# Altium PCB NIR.PcbDoc
Units mm, origin at the board's own origin, x right, y up, seen from the top; angles counter-clockwise.
Board outline 100.03 x 100.02 mm, 2 copper layers (Top Layer, Bottom Layer); 107 components, 88 nets, 257 pads, 78 vias.
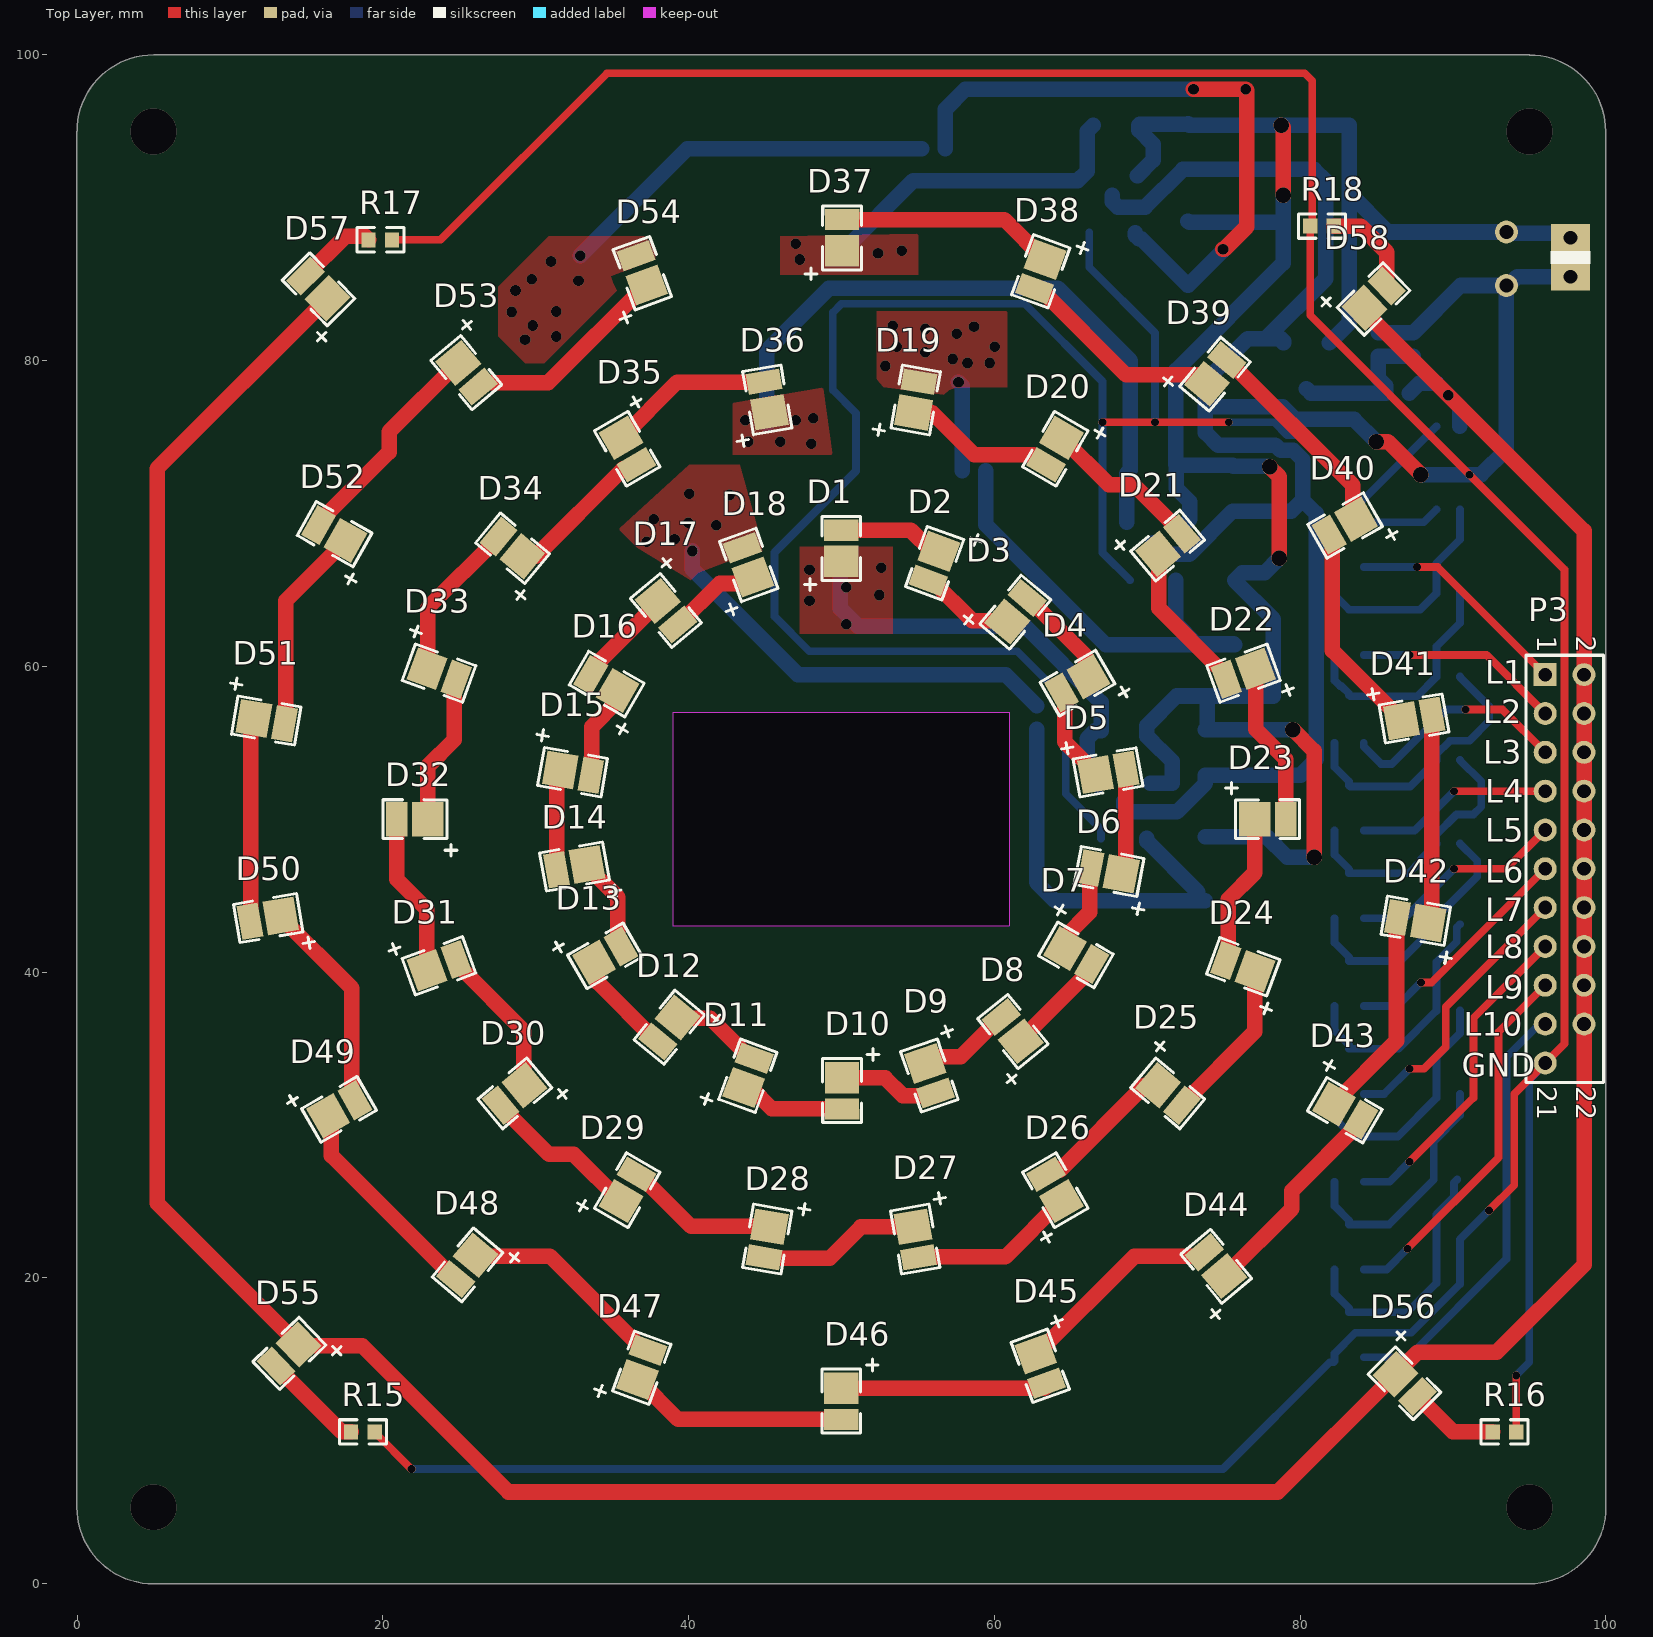
[diagram p0: Top Layer view]
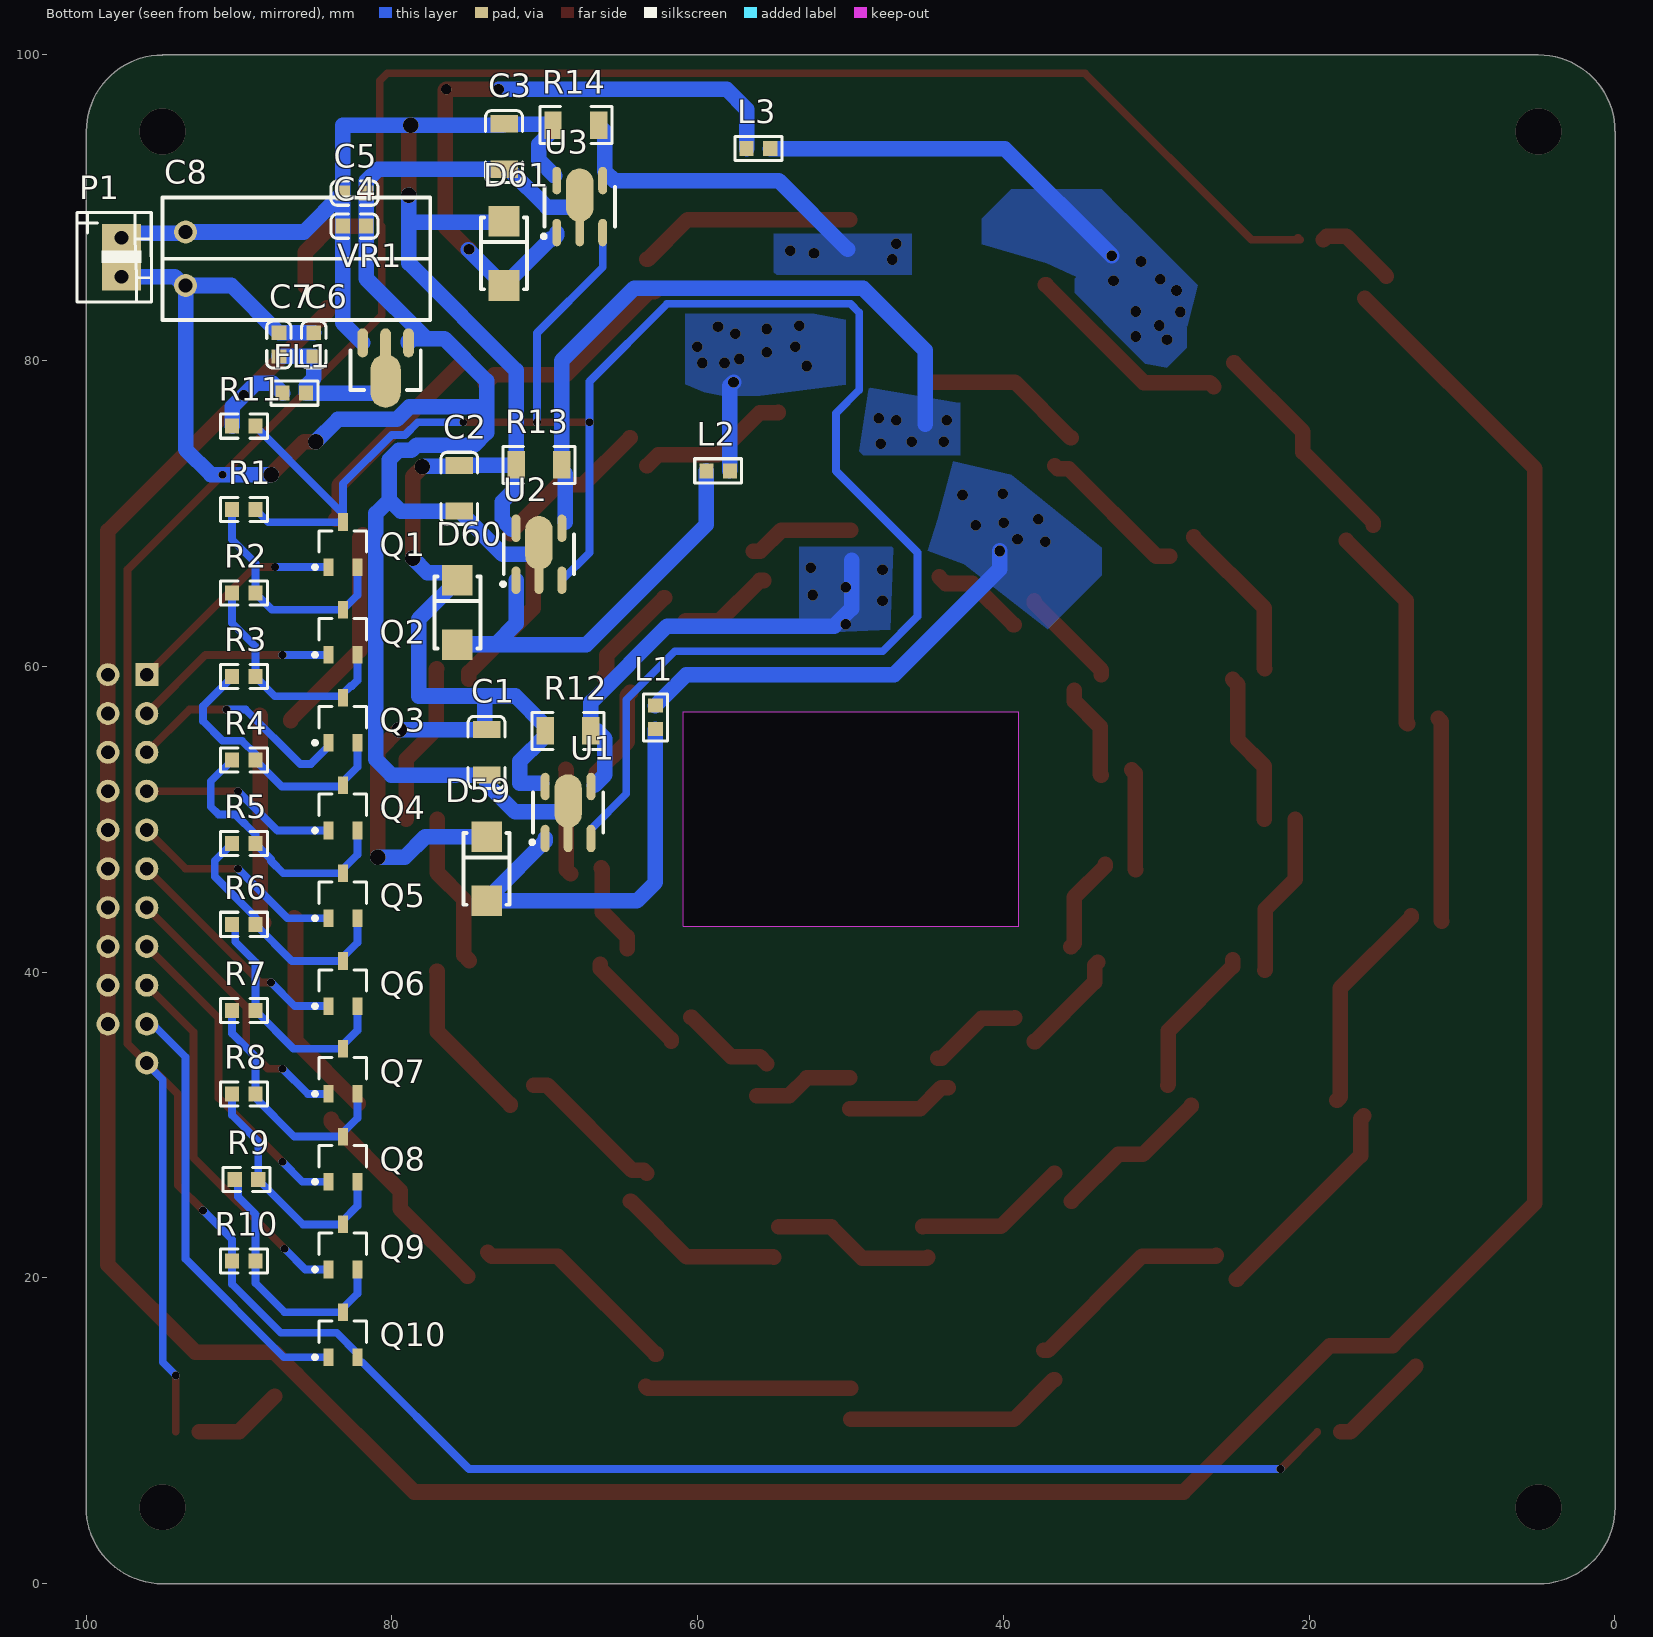
[diagram p1: Bottom Layer view, seen from below]
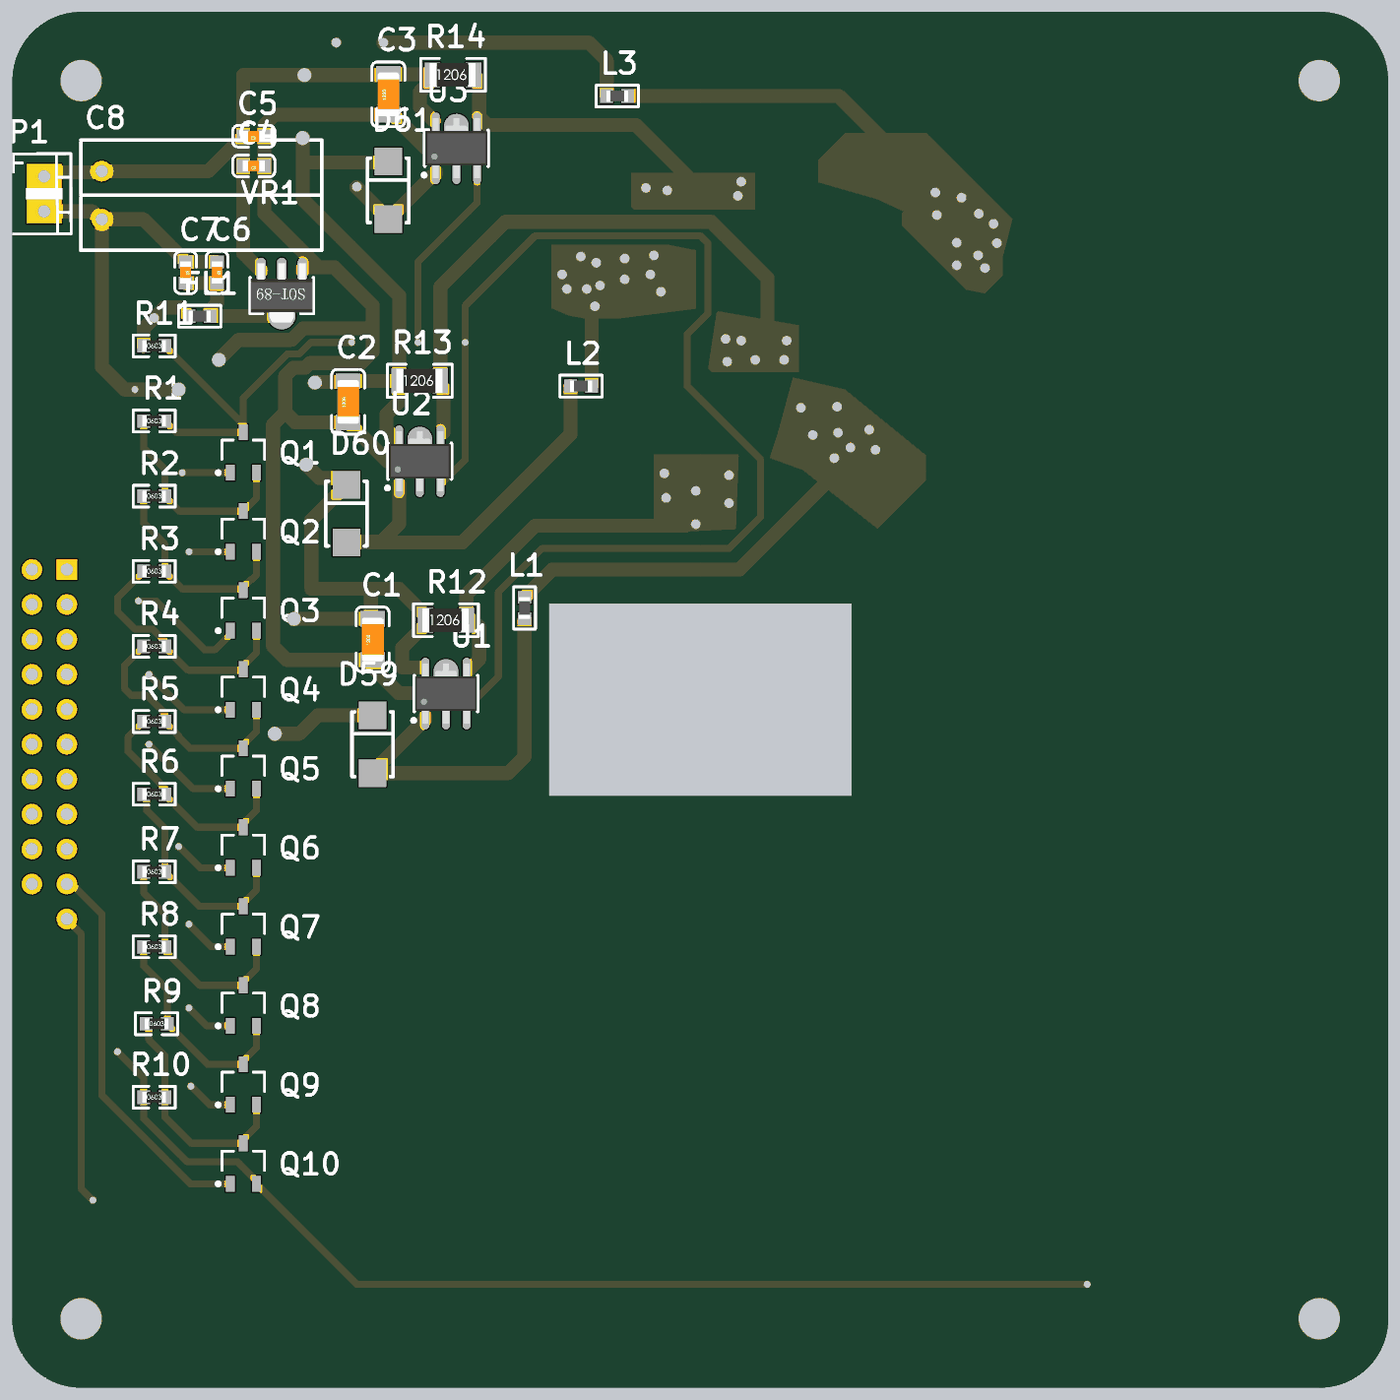
[diagram p2: 3D render of the assembled board from below, using the file's embedded part models]

## Layer stack, top to bottom
Top Solder: solder mask 0.0102, Solder Resist, Dk 3.5
Top Layer: signal copper 0.0356
Dielectric 1: dielectric 0.32, FR-4, Dk 4.8
Bottom Layer: signal copper 0.0356
Bottom Solder: solder mask 0.0102, Solder Resist, Dk 3.5

## Board outline
-0.017,5 -0.017,94.989 -0.007,95 cw(c5,95) 5,100.007 94.988,100.007 95,99.995 cw(c95,95) 99.995,95 99.995,5.014 100.009,5 cw(c95,5) 95,-0.009 5.009,-0.009 5,-0.017 cw(c5,5)
cut-out: 38.987,56.987 60.987,56.987 60.987,43.025 60.949,42.987 38.987,42.987

## Design rules (kind name [scope] priority, off if disabled: settings)
Clearance [All] p1: gap=0.254 ignorepadtopadclearanceinfootprint=FALSE except(0: Arc-Hole Track-Hole SMDPad-Hole THPad-Hole Via-Hole Fill-Hole Poly-Hole Region-Hole Text-Hole)
PlaneConnect [All] p1: planeconnectstyle=Direct reliefexpansion=0.508 reliefentries=4 reliefconductorwidth=0.254 reliefairgap=0.254
PolygonConnect [All] p1: connectstyle=Direct reliefconductorwidth=0.254 reliefentries=4 polygonreliefangle="90 Angle" airgapwidth=0.254
RoutingVias [All] p1: holewidth=0.711 width=1.27 viastyle="Through Hole" minholewidth=0.711 minwidth=1.27 maxholewidth=0.711 maxwidth=1.27
SolderMaskExpansion [All] p1: expansion=0.102
Width [All] p1: maxlimit=1.016 minlimit=0.254 preferedwidth=0.559 minimp=50.000000 maximp=50.000000 favimp=50.000000
29 further rules are at their usual default settings.

## Components (designator, comment, footprint, x,y, rotation, side; value= is the part's Value field where it differs from the comment)
C1 "100uF (475) 10% 50V" 1206_C 73.812,54.381 r90 bottom
C2 "100uF (475) 10% 50V" 1206_C 75.59,71.653 r90 bottom
C3 "100uF (475) 10% 50V" 1206_C 72.669,94.005 r90 bottom
C4 "10uF (106) 10% 25V" 0603_C 82.448,88.798 r0 bottom
C5 "100nF (104) 10% 16V" 0603_C 82.448,90.957 r0 bottom
C6 "10uF (106) 10% 25V" 0603_C 85.115,81.051 r270 bottom
C7 "100nF (104) 10% 16V" 0603_C 87.401,81.051 r270 bottom
C8 "47uF (106) 20% 50V" "470UF 35V" 93.51,86.678 r90 bottom
D1 "红灯 0603" 2385 49.987,67.767 r90 top
D2 "红灯 0603" 2385 56.069,66.695 r250 top
D3 "红灯 0603" 2385 61.416,63.608 r50 top
D4 "红灯 0603" 2385 65.385,58.877 r210 top
D5 "红灯 0603" 2385 67.497,53.075 r10 top
D6 "红灯 0603" 2385 67.441,46.595 r169 top
D7 "红灯 0603" 2385 65.39,41.095 r330 top
D8 "红灯 0603" 2385 61.177,36.17 r129 top
D9 "红灯 0603" 2385 55.776,33.176 r289 top
D10 "红灯 0603" 2385 50.04,32.194 r270.17 top
D11 "红灯 0603" 2385 43.906,33.28 r70 top
D12 "红灯 0603" 2385 38.705,36.344 r230.41 top
D13 "红灯 0603" 2385 34.589,41.097 r30 top
D14 "红灯 0603" 2385 32.478,46.9 r190 top
D15 "红灯 0603" 2385 32.478,53.075 r350 top
D16 "红灯 0603" 2385 34.589,58.877 r150 top
D17 "红灯 0603" 2385 38.559,63.608 r310 top
D18 "红灯 0603" 2385 43.906,66.695 r110 top
D19 "红灯 0603" 2385 54.877,77.496 r79.92 top
D20 "红灯 0603" 2385 63.957,74.184 r240 top
D21 "红灯 0603" 2385 71.391,67.947 r40 top
D22 "红灯 0603" 2385 76.242,59.543 r200 top
D23 "红灯 0603" 2385 77.927,50.006 r0.04 top
D24 "红灯 0603" 2385 76.219,40.368 r159.86 top
D25 "红灯 0603" 2385 71.391,32.028 r320 top
D26 "红灯 0603" 2385 63.957,25.791 r120 top
D27 "红灯 0603" 2385 54.839,22.472 r280 top
D28 "红灯 0603" 2385 45.136,22.472 r260 top
D29 "红灯 0603" 2385 36.017,25.791 r60 top
D30 "红灯 0603" 2385 28.584,32.028 r220 top
D31 "红灯 0603" 2385 23.732,40.431 r20 top
D32 "红灯 0603" 2385 22.047,50.007 r179.96 top
D33 "红灯 0603" 2385 23.732,59.543 r340 top
D34 "红灯 0603" 2385 28.436,67.769 r140.47 top
D35 "红灯 0603" 2385 36.017,74.184 r300 top
D36 "红灯 0603" 2385 45.136,77.503 r100 top
D37 "红灯 0603" 2385 50.044,88.087 r89.92 top
D38 "红灯 0603" 2385 63.018,85.79 r250 top
D39 "红灯 0603" 2385 74.478,79.174 r50 top
D40 "红灯 0603" 2385 82.895,69.188 r209.74 top
D41 "红灯 0603" 2385 87.509,56.603 r10 top
D42 "红灯 0603" 2385 87.509,43.371 r170 top
D43 "红灯 0603" 2385 82.983,30.937 r330 top
D44 "红灯 0603" 2385 74.478,20.801 r130 top
D45 "红灯 0603" 2385 63.018,14.185 r290 top
D46 "红灯 0603" 2385 49.987,11.887 r270 top
D47 "红灯 0603" 2385 36.956,14.185 r70 top
D48 "红灯 0603" 2385 25.497,20.801 r230 top
D49 "红灯 0603" 2385 17.189,31.051 r30 top
D50 "红灯 0603" 2385 12.439,43.526 r189.76 top
D51 "红灯 0603" 2385 12.439,56.449 r350.24 top
D52 "红灯 0603" 2385 16.789,68.682 r150.62 top
D53 "红灯 0603" 2385 25.497,79.174 r310 top
D54 "红灯 0603" 2385 36.956,85.79 r110 top
D55 "红灯 0603" 2385 13.84,15.021 r224.05 top
D56 "红灯 0603" 2385 86.869,13.062 r314.97 top
D57 "红灯 0603" 2385 15.749,84.716 r134.59 top
D58 "红灯 0603" 2385 84.856,84.083 r44.36 top
D59 "SS14" SMA(DO-214AC)_S1 73.812,46.761 r270 bottom
D60 "SS14" SMA(DO-214AC)_S1 75.717,63.525 r270 bottom
D61 "SS14" SMA(DO-214AC)_S1 72.669,87.02 r270 bottom
FL1 "BLM18HE152SN1" 0603_L 86.385,77.876 r0 bottom
L1 "680nH ±5% 0603" 0603_L 62.763,56.667 r270 bottom
L2 "680nH ±5% 0603" 0603_L 58.658,72.796 r0 bottom
L3 "680nH ±5% 0603" 0603_L 56.029,93.878 r0 bottom
P1 "Header 2" DIP-2.54-2P 97.688,88.036 r270 bottom
P3 "Header 11X2" HDR2X11 96.037,59.461 r270 top
Q1 "AO3400A N道沟 X0YV1T SOT-23" SOT-23-3L 83.21,67.97 r270 bottom
Q2 "AO3400A N道沟 X0YV1T SOT-23" SOT-23-3L 83.21,62.227 r270 bottom
Q3 "AO3400A N道沟 X0YV1T SOT-23" SOT-23-3L 83.21,56.484 r270 bottom
Q4 "AO3400A N道沟 X0YV1T SOT-23" SOT-23-3L 83.21,50.741 r270 bottom
Q5 "AO3400A N道沟 X0YV1T SOT-23" SOT-23-3L 83.21,44.998 r270 bottom
Q6 "AO3400A N道沟 X0YV1T SOT-23" SOT-23-3L 83.21,39.254 r270 bottom
Q7 "AO3400A N道沟 X0YV1T SOT-23" SOT-23-3L 83.21,33.511 r270 bottom
Q8 "AO3400A N道沟 X0YV1T SOT-23" SOT-23-3L 83.21,27.768 r270 bottom
Q9 "AO3400A N道沟 X0YV1T SOT-23" SOT-23-3L 83.21,22.025 r270 bottom
Q10 "AO3400A N道沟 X0YV1T SOT-23" SOT-23-3L 83.21,16.281 r270 bottom
R1 "13.7KΩ (1003) ±1%" 0603_R 89.687,70.256 r180 bottom
R2 "10(23.7)KΩ (1003) ±1%" 0603_R 89.687,64.795 r180 bottom
R3 "12(35.7)KΩ (1003) ±1%" 0603_R 89.687,59.334 r180 bottom
R4 "14.2(49.9)KΩ (1003) ±1%" 0603_R 89.687,53.873 r180 bottom
R5 "16.6(66.5)KΩ (1003) ±1%" 0603_R 89.687,48.412 r180 bottom
R6 "22.2(88.7)KΩ (1003) ±1%" 0603_R 89.687,43.127 r180 bottom
R7 "29.3(118)KΩ (1003) ±1%" 0603_R 89.687,37.49 r180 bottom
R8 "38(156)KΩ (1003) ±1%" 0603_R 89.687,32.029 r180 bottom
R9 "54(210)KΩ (1003) ±1%" 0603_R 89.511,26.441 r180 bottom
R10 "90(300)KΩ (1003) ±1%" 0603_R 89.687,21.107 r180 bottom
R11 "100KΩ (1003) ±1%" 0603_R 89.687,75.717 r180 bottom
R12 "0.56Ω (R100) ±1%" 1206_R 68.478,55.778 r180 bottom
R13 "0.56Ω (R100) ±1%" 1206_R 70.383,73.177 r180 bottom
R14 "0.56Ω (R100) ±1%" 1206_R 67.97,95.414 r180 bottom
R15 "330Ω (3300) ±1%" 0603_R 18.694,9.931 r0 top
R16 "330Ω (3300) ±1%" 0603_R 93.37,9.931 r0 top
R17 "330Ω (3300) ±1%" 0603_R 19.837,87.909 r0 top
R18 "330Ω (3300) ±1%" 0603_R 81.432,88.798 r180 top
U1 "OC5265" SOT-89-5 68.478,50.444 r270 bottom
U2 "OC5265" SOT-89-5 70.383,67.335 r270 bottom
U3 "OC5265" SOT-89-5 67.716,90.08 r270 bottom
VR1 "SE8533" SOT-89(SOT-89-3) 80.416,81.17 r90 bottom

## Footprints (in the part's own frame and the unit in brackets; to place one, negate y for a bottom-side part, rotate by r counter-clockwise, add the part's x,y. Pads: shape width x height; smd on the part's side, far side on the other; paste and mask are expansions set on the pad)
"470UF 35V" [mm]
  round 1.5 hole 0.9: 1(-1.76,-0.012) 2(1.74,-0.012)
  silkscreen extent -4.01,-16.01 3.99,1.51
0603_C [mm]
  rect 0.93x0.98 smd: 1(-0.77,0) 2(0.77,0)
  silkscreen extent -1.53,-0.79 1.54,0.79, body extent -0.8,-0.4 0.8,0.4, height 0.3
0603_L [mm]
  rect 0.93x0.98 smd: 1(-0.77,0) 2(0.77,0)
  silkscreen extent -1.53,-0.79 1.54,0.79, body extent -0.8,-0.41 0.8,0.41, height 0.46
0603_R [mm]
  rect 0.93x0.98 smd: 1(-0.77,0) 2(0.77,0)
  silkscreen extent -1.53,-0.79 1.54,0.79, body extent -0.85,-0.4 0.85,0.4, height 0.56
1206_C [mm]
  rect 1.13x1.8 smd: 1(-1.49,0) 2(1.49,0)
  silkscreen extent -2.36,-1.2 2.35,1.2, body extent -1.6,-0.81 1.6,0.79, height 1
1206_R [mm]
  rect 1.13x1.8 smd: 1(-1.49,0) 2(1.49,0)
  silkscreen extent -2.36,-1.2 2.35,1.2, body extent -1.7,-0.86 1.65,0.87, height 0.85
2385 [mm]
  rect 2.06x2.24 smd: A(-0.889,0)
  rect 1.39x2.24 smd: K(1.143,0)
  silkscreen extent -2.79,-1.27 2.03,2.41
DIP-2.54-2P [mm]
  rect 1.8x2.54 hole 0.9: 1(0,0) 2(2.54,0)
  silkscreen extent -1.65,-2.92 4.2,1.96
HDR2X11 [mm] "Connector; Header; 11x2 Position"
  rect 1.5x1.5 hole 0.9: 1(0,0)
  round 1.5 hole 0.9: 2(0,2.54) 3(2.54,0) 4(2.54,2.54) 5(5.08,0) 6(5.08,2.54) 7(7.62,0) 8(7.62,2.54) 9(10.16,0) 10(10.16,2.54) 11(12.7,0) 12(12.7,2.54) 13(15.24,0) 14(15.24,2.54) 15(17.78,0) 16(17.78,2.54) 17(20.32,0) 18(20.32,2.54) 19(22.86,0) 20(22.86,2.54) 21(25.4,0)
  silkscreen extent -1.27,-1.27 26.67,3.81
SMA(DO-214AC)_S1 [mm]
  rect 2x2 smd: 1(2.1,0) 2(-2.1,0)
  silkscreen extent -2.35,-1.5 2.35,1.5
SOT-23-3L [mm] "http://www.aosmd.com/res/packaging_information/SOT-23-3L.pdf"
  rect 1.15x0.65 smd: 1(1.475,-0.95) 2(1.475,0.95) 3(-1.475,0)
  silkscreen extent -0.9,-1.95 1.6,1.55, body extent -0.9,-1.55 0.9,1.55, height 1.25
SOT-89(SOT-89-3) [mm]
  oval 1.9x0.7 smd: 1(0,-1.5) 3(0,1.5)
  oval 3.5x2 smd: 2(-2.5,0)
  oval 2.1x0.7 smd: 2(-0.1,0)
  silkscreen extent -3.1,-2.3 -0.5,2.3, body extent -3.75,-2.25 0.55,2.25, height 1.51
SOT-89-5 [mm]
  oval 1.8x0.58 smd: 1(1.7,-1.5) 3(1.7,1.5) 4(-1.7,1.5) 5(-1.7,-1.5)
  oval 3.5x1.8 smd: 2(-0.75,0)
  oval 2.4x0.58 smd: 2(1.4,0)
  silkscreen extent -1.3,-2.48 2.07,2.3, body extent -2.17,-2.25 2.18,2.25, height 1.5

## Part data
C1 C2 C3: library part "1206 4.7uF (475) 10% 50V", "贴片电容", Package=1206, SuppliersPartNumber=C29823, ComponentLink1Description=供应商, ComponentLink1URL=http://www.szlcsc.com/product/details_30577.html, Supplier=LC
C4 C6: library part "0805 10uF (106) 10% 25V", "贴片电容", Package=0805, SuppliersPartNumber=C15850, ComponentLink1Description=供应商, ComponentLink1URL=http://www.szlcsc.com/product/details_16532.html, Supplier=LC
C5 C7: library part "0402 100nF (104) 10% 16V", "贴片电容", Package=0402, SuppliersPartNumber=C1525, ComponentLink1Description=供应商, ComponentLink1URL=http://www.szlcsc.com/product/details_1877.html, Supplier=LC
C8: library part "0402 10uF (106) 20% 6.3V", "贴片电容", Package=0402, SuppliersPartNumber=C15525, ComponentLink1Description=供应商链接, ComponentLink1URL=http://www.szlcsc.com/product/details_16204.html, Supplier=LC
D1 D2 D3 D4 D5 D6 D7 D8 D9 D10 D11 D12 D13 D14 D15 D16 D17 D18 D19 D20 D21 D22 D23 D24 D25 D26 D27 D28 D29 D30 D31 D32 D33 D34 D35 D36 D37 D38 D39 D40 D41 D42 D43 D44 D45 D46 D47 D48 D49 D50 D51 D52 D53 D54 D55 D56 D57 D58: library part "0603 红灯", "发光二极管", Package=0603, SuppliersPartNumber=C2286, ComponentLink1Description=供应商, ComponentLink1URL=http://www.szlcsc.com/product/details_2659.html, Supplier=LC
D59 D60 D61: library part "SMA(DO-214AC) SS54", "二极管", Package=SMA(DO-214AC), SuppliersPartNumber=C22452, ComponentLink1Description=供应商, ComponentLink1URL=http://www.szlcsc.com/product/details_23178.html, Supplier=LC
FL1: library part IND_DM_1MH_2.5A, "差模电感1mH/2.5A", Text Field1=29.5mm, Text Field2=43120014, Text Field3=HI
L1 L2 L3: library part "0603 68nH 5% 0603", "贴片电感", Package=0603, SuppliersPartNumber=C13415, ComponentLink1Description=供应商, ComponentLink1URL=http://www.szlcsc.com/product/details_14064.html, Supplier=LC
P1: "Header, 2-Pin", LatestRevisionDate=17-Jul-2002, LatestRevisionNote="Re-released for DXP Platform.", Publisher="Altium Limited"
P3: "Header, 11-Pin, Dual row", LatestRevisionDate=17-Jul-2002, LatestRevisionNote="Re-released for DXP Platform.", Publisher="Altium Limited"
Q1 Q2 Q3 Q4 Q5 Q6 Q7 Q8 Q9 Q10: "MOS(场效应管)", Package=SOT-23, SuppliersPartNumber=C20917, ComponentLink1Description=供应商, ComponentLink1URL=http://www.szlcsc.com/product/details_21629.html, Supplier=LC
R1 R2 R3 R4 R5 R6 R7 R8 R9 R10 R11: library part "0603 100KΩ (1003) 1%", "贴片电阻", Package=0603, SuppliersPartNumber=C25803, ComponentLink1Description=供应商, ComponentLink1URL=http://www.szlcsc.com/product/details_26546.html, Supplier=LC
R12 R13 R14: library part "1206 0.1Ω (R100) 1%", "贴片电阻", Package=1206, SuppliersPartNumber=C25334, ComponentLink1Description=供应商, ComponentLink1URL=http://www.szlcsc.com/product/details_26077.html, Supplier=LC
R15 R16 R17 R18: library part "0603 330Ω (3300) 1%", "贴片电阻", Package=0603, SuppliersPartNumber=C23138, ComponentLink1Description=供应商, ComponentLink1URL=http://www.szlcsc.com/product/details_23865.html, Supplier=LC
VR1: library part "SOT-223 AMS1117-3.3", "低压差线性稳压(LDO)", Package=SOT-223, SuppliersPartNumber=C6186, ComponentLink1Description=供应商, ComponentLink1URL=http://www.szlcsc.com/product/details_6652.html, Supplier=LC

## Via types
v1: diameter 0.7, hole 0.7, Top Layer to Bottom Layer, tented both sides, 50 vias
v2: diameter 0.508, hole 0.508, Top Layer to Bottom Layer, tented both sides, 13 vias
v3: diameter 1.016, hole 1.016, Top Layer to Bottom Layer, tented both sides, 8 vias
v4: diameter 3, hole 3, Top Layer to Bottom Layer, 4 vias
v5: diameter 0.5, hole 0.5, Top Layer to Bottom Layer, tented both sides, 3 vias

## Nets (pads, with @x,y where several pads share a name; then routed paths per layer and width w, separated by ;. In a path a pad name is that pad's centre, name@x,y a point inside that pad or via, vN(x,y) a via of type N, cw(c..) or ccw(c..) an arc to the next point about the centre after c; other vN are vias at no path point)
3.3V: D55.A D56.A D57.A D58.A FL1.2 P3.2 P3.4 P3.6 P3.8 P3.10 P3.12 P3.14 P3.16 P3.18 P3.20 R11.1 | length 245.2
  Top Layer w1.016: D57.A 5.232,72.943 5.232,24.888 14.479,15.641 D55.A 14.542,15.576 18.638,15.576 28.219,5.994 78.544,5.994 D56.A 87.688,15.138 92.862,15.138 98.577,20.853 98.577,34.061 P3.20 P3.18 P3.16 P3.14 P3.12 P3.10 P3.8 P3.6 P3.4 P3.2 98.577,68.859 84.221,83.216 D58.A
  Bottom Layer w1.016: FL1.2 87.79,78.511 88.925,78.511 90.457,76.979 R11.1
  other v1: 89.691,77.745
36V: C1.2 C2.2 C3.2 C4.2 C5.2 C8.2 D59.2 D60.2 D61.2 P1.1 R12.1 R13.1 R14.1 U1.5 U2.5 U3.5 VR1.3 | length 148.6
  Top Layer w1.016: v3(78.003,73.05) 78.638,72.415 v3(78.638,67.081) ; v3(78.765,95.402) 78.892,95.275 v3(78.892,90.83) ; v3(79.527,55.871) 80.924,54.474 v3(80.924,47.523)
  Bottom Layer w1.016: U3.5@69.367,92.1 70.383,93.116 70.383,94.156 69.46,95.079 R14.1 69.501,95.455 72.629,95.455 C3.2 72.762,95.402 v3(78.765,95.402) 83.218,95.402 C5.2 ; U1.5@70.196,52.349 71.653,52.349 71.653,53.786 70.935,54.505 70.907,54.505 69.968,55.443 R12.1 69.968,56.113 71.919,58.064 73.939,58.064 ; U2.5@72.161,68.986 72.799,69.624 72.799,70.762 71.89,71.67 R13.1@71.89,73.16 ; D61.2 72.737,89.052 78.892,89.052 ; D59.2 77.817,48.861 79.155,47.523 v3(80.924,47.523) ; C1.2 C1.2@73.882,55.871 ; v3@77.84,73.086 75.647,73.086 C2.2 75.573,73.16 R13.1@71.89,73.16 ; v3(78.638,67.081) 77.674,66.117 76.209,66.117 D60.2 78.257,63.085 78.257,58.064 73.939,58.064 ; v3(78.892,90.83) 78.892,89.052 ; v3(79.527,55.871) C1.2@73.882,55.871 ; VR1.3 83.218,82.472 C4.2 C5.2 ; P1.1 97.4,88.325 93.59,88.325 C8.2 85.758,88.417 C5.2 ; R13.1@71.89,73.16 R13.1 71.873,79.366 78.892,86.385 78.892,89.052 ; C1.2@73.882,55.871 73.939,55.928 73.939,58.064
COM1: D1.A R12.2 U1.4 | length 29.1
  Bottom Layer w1.016: 49.936,66.935 49.936,63.779 51.079,62.636 62.001,62.636 66.988,57.649 R12.2 66.573,55.778 66.065,55.27 66.065,52.917 U1.4@66.76,52.222
  other v1: 50.317,62.763 47.904,64.289 52.476,64.668 50.317,65.176 47.904,66.319 52.603,66.446
COM1_GND: D18.K L1.1 | length 27.4
  Bottom Layer w1.016: v1(40.249,67.556) 40.249,66.355 47.142,59.461 60.739,59.461 L1.1
  other v1: 37.26,68.163 39.078,68.323 41.814,69.242 39.98,69.404 37.714,69.629 42.677,71.218 40.05,71.298
COM2: D9.K D10.A | length 6.6
  Top Layer w1.016: D10.A 52.857,33.084 54.025,31.916 D9.K@56.148,31.916
COM3: D36.A R13.2 U2.4 | length 42.9
  Bottom Layer w1.016: 45.11,75.844 45.11,80.67 49.174,84.734 64.16,84.734 68.893,80.001 R13.2 68.893,72.842 68.665,72.614 U2.4@68.665,69.427
  other v1: 48.031,74.574 43.897,74.701 45.999,74.701 43.713,76.098 47.015,76.098 48.158,76.225
COM3_GND: D19.K L2.1 | length 5.9
  Bottom Layer w1.016: v1(57.654,78.598) 57.888,78.364 L2.1
  other v1: 52.857,79.654 58.246,79.855 59.692,79.855 57.279,80.105 55.487,80.553 53.619,80.908 60.034,80.908 57.551,81.757 55.487,82.067 58.675,82.215 53.365,82.291
COM4: D27.A D28.K | length 10.6
  Top Layer w1.016: D28.K 45.011,21.272 49.22,21.272 51.279,23.332 54.669,23.332 D27.A
COM5: D37.A R14.2 U3.4 | length 21.2
  Bottom Layer w1.016: 50.19,87.274 54.696,91.78 65.459,91.78 66.065,92.387 66.065,94.999 R14.2
  other v1: 47.269,86.625 52.391,87.02 53.944,87.198 47.015,87.655
COM5_GND: D54.K L3.1 | length 25.3
  Bottom Layer w1.016: v1(32.907,86.864) 39.922,93.878 L3.1
  other v1: 29.3,81.375 31.352,81.584 29.797,82.298 28.427,83.187 31.352,83.219 28.675,84.591 32.798,85.231 29.75,85.327 30.999,86.492
COM6: D45.K D46.A | length 13.5
  Top Layer w1.016: D46.A 63.278,12.776 D45.K@63.409,12.908
DIM: Q1.3 R1.2 R11.2 U1.3 U2.3 U3.3 | length 136.1
  Top Layer w0.508: v5(67.081,75.971) v5(70.51,75.971) v5(75.336,75.971)
  Bottom Layer w0.508: U3.3 66.216,86.107 70.51,81.813 v5(70.51,75.971) ; U1.3 66.978,49.354 64.668,51.664 64.668,57.81 61.493,60.985 47.904,60.985 45.618,63.271 45.618,67.449 50.952,72.783 50.952,76.563 49.428,78.087 49.428,83.147 50,83.718 62.001,83.718 67.081,78.638 v5(67.081,75.971) 67.081,67.437 U2.3 ; v5(75.336,75.971) 78.315,75.971 79.144,75.142 80.015,75.142 83.21,71.947 83.21,69.985 84.425,71.2 88.917,75.692 R11.2 ; Q1.3 Q1.3@83.21,69.695 ; Q1.3@83.335,69.57 83.478,69.427 88.088,69.427 R1.2
GND: C1.1 C2.1 C3.1 C4.1 C5.1 C6.1 C7.1 C8.1 P1.2 P3.21 Q10.2 R10.1 R15.2 R16.2 R17.2 R18.2 U1.2 U2.2 U3.2 VR1.1 | length 394.2
  Top Layer w0.508: R15.2 19.464,9.906 v2(21.869,7.501) ; R17.2@20.734,88.036 R17.2 23.774,87.909 34.671,98.806 80.308,98.806 80.797,98.316 80.797,88.933 R18.2 80.662,82.964 v2(91.084,72.542) 97.295,66.331 97.295,35.319 P3.21 94.005,32.029 94.005,26.06 v2(92.354,24.409) ; R16.2 v2(94.14,13.622)
  Top Layer w1.016: v3(84.988,74.701) 85.75,74.701 v3(87.909,72.542)
  Bottom Layer w0.508: v2(21.869,7.501) 74.955,7.501 81.939,14.485 82.189,14.485 82.26,14.556 Q10.2 82.26,15.056 83.612,16.408 87.274,16.408 90.457,19.591 R10.1 90.457,22.512 v2(92.354,24.409) ; v2(94.14,13.622) 94.994,14.476 94.994,32.967 96.037,34.01 P3.21
  Bottom Layer w1.016: U3.2@67.716,90.83 67.716,90.405 68.079,90.042 69.861,90.042 72.334,92.515 C3.1 80.923,92.515 81.678,91.76 C5.1 C4.1 81.678,85.361 77.749,81.432 ; U1.2@68.478,51.194 68.478,50.845 68.841,50.482 71.945,50.482 73.812,52.349 C1.1 80.03,52.891 81.051,53.913 81.051,70.002 80.162,70.891 ; U2.2@70.383,68.085 70.383,67.687 70.746,67.324 72.751,67.324 C2.1 79.434,70.163 80.162,70.891 ; VR1.1 78.916,81.274 78.758,81.432 77.749,81.432 ; v3(84.988,74.701) 83.531,76.158 79.687,76.158 78.858,76.987 74.787,76.987 74.783,76.983 73.812,76.983 ; C6.1 C7.1 90.497,84.917 C8.1 ; v3(87.909,72.542) v2(91.084,72.542) 91.846,72.542 93.497,74.193 C8.1 ; P1.2 94.207,85.496 93.628,84.917 C8.1 ; 73.812,76.983 73.812,75.297 74.639,74.47 78.379,74.47 78.723,74.126 79.567,74.126 80.162,73.531 80.162,70.891 ; 73.812,76.983 73.812,78.67 76.574,81.432 77.749,81.432
L1: P3.1 Q1.1 | length 14.8
  Top Layer w0.508: v2(87.655,66.495) 89.003,66.495 P3.1
  Bottom Layer w0.508: Q1.1 v2(87.655,66.495)
L2: P3.3 Q2.1 | length 13.5
  Top Layer w0.508: v2(87.155,60.752) 92.194,60.752 96.025,56.921 P3.3
  Bottom Layer w0.508: Q2.1 v2(87.155,60.752)
L3: P3.5 Q3.1 | length 15.2
  Top Layer w0.508: v2(90.83,57.175) 93.243,57.175 P3.5
  Bottom Layer w0.508: Q3.1 84.16,54.759 85.3,53.619 86.004,53.619 89.56,57.175 v2(90.83,57.175)
L4: P3.7 Q4.1 | length 12.9
  Top Layer w0.508: v2(90.068,51.841) P3.7
  Bottom Layer w0.508: Q4.1 87.493,49.266 v2(90.068,51.841)
L5: P3.9 Q5.1 | length 14.3
  Top Layer w0.508: v2(90.068,46.761) 93.497,46.761 P3.9
  Bottom Layer w0.508: Q5.1 86.83,43.523 v2(90.068,46.761)
L6: P3.11 Q6.1 | length 15.6
  Top Layer w0.508: v2(87.909,39.329) 88.605,39.329 P3.11
  Bottom Layer w0.508: Q6.1 86.36,37.779 v2(87.909,39.329)
L7: P3.13 Q7.1 | length 18.5
  Top Layer w0.508: v2(87.155,33.68) 88.111,33.68 89.534,35.104 89.534,37.718 P3.13
  Bottom Layer w0.508: Q7.1 85.511,32.036 v2(87.155,33.68)
L8: P3.15 Q8.1 | length 21.3
  Top Layer w0.508: v2(87.155,27.592) 91.338,31.775 91.338,36.982 P3.15
  Bottom Layer w0.508: Q8.1 85.856,26.293 v2(87.155,27.592)
L9: P3.17 Q9.1 | length 24.4
  Top Layer w0.508: v2(87.02,21.904) 92.989,27.873 92.989,36.093 P3.17
  Bottom Layer w0.508: Q9.1 85.666,20.55 v2(87.02,21.904)
L10: P3.19 Q10.1 | length 28.6
  Bottom Layer w0.508: Q10.1 87.069,14.806 93.497,21.234 93.497,34.442 95.656,36.601 P3.19
NetC6_2: C6.2 C7.2 FL1.1 VR1.2 | length 10.2
  Bottom Layer w1.016: VR1.2@80.416,78.17 80.71,77.876 FL1.1 85.615,78.345 85.115,78.845 C6.2 C7.2
NetD1_K: D1.K D2.A | length 7
  Top Layer w1.016: D1.K 54.532,68.91 55.912,67.531 D2.A
NetD2_K: D2.K D3.A | length 6.3
  Top Layer w1.016: D2.K 55.932,65.621 58.568,62.985 60.787,62.985 D3.A
NetD3_K: D3.K D4.A | length 6.9
  Top Layer w1.016: D3.K 62.203,64.483 65.944,60.743 65.944,59.533 D4.A
NetD4_K: D4.K D5.A | length 6.3
  Top Layer w1.016: D4.K 64.608,58.093 64.608,55.067 66.622,53.054 D5.A
NetD5_K: D5.K D6.A | length 7
  Top Layer w1.016: D6.A 68.593,46.704 68.593,53.243 D5.K
NetD6_K: D6.K D7.A | length 6
  Top Layer w1.016: D7.A 64.62,42.304 66.238,43.922 66.238,46.732 D6.K
NetD7_K: D7.K D8.A | length 7
  Top Layer w1.016: D8.A 61.736,35.595 66.38,40.238 D7.K
NetD8_K: D8.K D9.A | length 6.2
  Top Layer w1.016: D9.A 55.944,34.474 57.811,34.474 60.395,37.058 D8.K
NetD10_K: D10.K D11.A | length 7
  Top Layer w1.016: D11.A 44.063,32.444 45.457,31.05 50.042,31.05 D10.K
NetD11_K: D11.K D12.A | length 6.1
  Top Layer w1.016: D12.A 39.329,36.971 41.426,36.971 44.043,34.354 D11.K
NetD12_K: D12.K D13.A | length 6.9
  Top Layer w1.016: D13.A 34.031,40.441 34.031,39.351 37.92,35.463 D12.K
NetD13_K: D13.K D14.A | length 6.3
  Top Layer w1.016: D14.A 33.353,46.921 35.367,44.907 35.367,41.881 D13.K
NetD14_K: D14.K D15.A | length 6.6
  Top Layer w1.016: D14.K 31.382,46.732 31.382,53.009 D15.A
NetD15_K: D15.K D16.A | length 6.3
  Top Layer w1.016: D15.K 33.677,52.95 33.677,56.053 35.359,57.735 D16.A
NetD16_K: D16.K D17.A | length 6.7
  Top Layer w1.016: D16.K 33.6,59.758 37.987,64.146 D17.A
NetD17_K: D17.K D18.A | length 6.2
  Top Layer w1.016: D17.K 39.346,62.732 42.037,65.424 43.774,65.424 D18.A
NetD19_A: D19.A D20.K | length 10
  Top Layer w1.016: D19.A 54.737,76.605 55.925,76.605 58.675,73.856 62.569,73.856 63.29,73.135 D20.K@63.326,73.135
NetD20_A: D20.A D21.K | length 10.5
  Top Layer w1.016: D20.A 64.435,74.954 67.49,71.899 69.101,71.899 72.266,68.734 D21.K
NetD21_A: D21.A D22.K | length 10
  Top Layer w1.016: D21.A 70.768,67.318 70.768,63.807 74.965,59.61 D22.K@74.965,59.153
NetD22_A: D22.A D23.K | length 10.7
  Top Layer w1.016: D22.A 77.109,59.817 77.109,55.875 79.07,53.913 D23.K
NetD23_A: D23.A D24.K | length 10.1
  Top Layer w1.016: D24.K@74.939,40.761 75.292,41.114 75.292,44.755 77.038,46.501 D23.A
NetD24_A: D24.A D25.K | length 10.8
  Top Layer w1.016: D25.K 72.266,31.346 77.023,36.102 77.023,40.03 D24.A
NetD25_A: D25.A D26.K | length 9.8
  Top Layer w1.016: D26.K@63.326,26.84 63.524,27.037 64.277,27.037 69.839,32.599 D25.A
NetD26_A: D26.A D27.K | length 10.9
  Top Layer w1.016: D27.K 55.068,21.377 60.725,21.377 64.369,25.021 D26.A
NetD28_A: D28.A D29.K | length 10.1
  Top Layer w1.016: D29.K@36.648,26.84 36.685,26.84 40.162,23.363 45.274,23.363 D28.A
NetD29_A: D29.A D30.K | length 10.5
  Top Layer w1.016: D30.K 27.709,31.241 30.874,28.075 32.485,28.075 35.54,25.021 D29.A
NetD30_A: D30.A D31.K | length 10
  Top Layer w1.016: D31.K@25.01,40.822 25.01,40.365 29.207,36.167 29.207,32.657 D30.A
NetD31_A: D31.A D32.K | length 10.7
  Top Layer w1.016: D32.K 20.904,46.082 22.866,44.12 22.866,40.158 D31.A
NetD32_A: D32.A D33.K | length 10
  Top Layer w1.016: D32.A 22.936,53.474 24.661,55.198 24.661,58.804 D33.K@25.01,59.153
NetD33_A: D33.A D34.K | length 10.6
  Top Layer w1.016: D33.A 22.928,59.878 22.928,63.812 27.555,68.439 D34.K
NetD34_A: D34.A D35.K | length 10
  Top Layer w1.016: D34.A 30.005,67.203 35.739,72.938 36.451,72.938 D35.K@36.648,73.135
NetD35_A: D35.A D36.K | length 10.9
  Top Layer w1.016: D35.A 35.606,74.954 39.25,78.598 44.907,78.598 D36.K
NetD37_K: D37.K D38.A | length 14.4
  Top Layer w1.016: D37.K 60.663,89.23 63.269,86.625 D38.A
NetD38_K: D38.K D39.A | length 13.9
  Top Layer w1.016: D38.K 62.831,84.512 63.184,84.512 68.623,79.074 73.314,79.074 73.895,78.493 D39.A
NetD39_K: D39.K D40.A | length 14
  Top Layer w1.016: D39.K 75.265,80.049 83.449,71.865 83.449,69.846 D40.A
NetD40_K: D40.K D41.A | length 14.1
  Top Layer w1.016: D40.K 82.113,68.41 82.113,61.042 86.633,56.522 D41.A
NetD41_K: D41.K D42.A | length 13.7
  Top Layer w1.016: D42.A 88.604,43.437 88.604,56.772 D41.K
NetD42_K: D42.K D43.A | length 13.9
  Top Layer w1.016: D43.A 82.213,31.415 86.309,35.511 86.309,43.496 D42.K
NetD43_K: D43.K D44.A | length 13.9
  Top Layer w1.016: D44.A 75.06,20.12 79.462,24.522 79.462,25.7 83.973,30.21 D43.K
NetD44_K: D44.K D45.A | length 13.8
  Top Layer w1.016: D45.A 62.768,15.021 69.151,21.404 73.47,21.404 D44.K
NetD46_K: D46.K D47.A | length 14.4
  Top Layer w1.016: D47.A 36.706,13.35 39.311,10.744 D46.K
NetD47_K: D47.K D48.A | length 13.9
  Top Layer w1.016: D48.A 26.126,21.424 30.928,21.424 37.093,15.259 D47.K
NetD48_K: D48.K D49.A | length 14.2
  Top Layer w1.016: D49.A 16.631,30.395 16.631,28.005 24.71,19.926 D48.K
NetD49_K: D49.K D50.A | length 14.1
  Top Layer w1.016: D50.A 13.315,43.603 17.967,38.952 17.967,31.835 D49.K
NetD50_K: D50.K D51.A | length 13.4
  Top Layer w1.016: D50.K 11.348,43.367 11.348,56.385 D51.A
NetD51_K: D51.K D52.A | length 13.6
  Top Layer w1.016: D51.K 13.638,56.327 13.638,64.285 17.564,68.211 D52.A
NetD52_K: D52.K D53.A | length 14.4
  Top Layer w1.016: D52.K 15.793,69.404 20.411,74.022 20.411,75.351 24.915,79.855 D53.A
NetD53_K: D53.K D54.A | length 13.8
  Top Layer w1.016: D53.K 26.505,78.571 30.824,78.571 37.207,84.954 D54.A
NetD55_K: D55.K R15.1 | length 6.7
  Top Layer w1.016: D55.K 13.019,14.216 17.303,9.931 R15.1
NetD56_K: D56.K R16.1 | length 5.9
  Top Layer w1.016: D56.K@87.677,12.253 89.999,9.931 R16.1
NetD57_K: D57.K R17.1 | length 5.3
  Top Layer w1.016: D57.K 14.951,85.53 17.564,88.142 18.834,88.142 R17.1
NetD58_K: D58.K R18.1 | length 6.4
  Top Layer w1.016: R18.1 83.972,88.798 85.674,87.097 D58.K
NetD59_1: D59.1 L1.2 U1.1 | length 26.5
  Bottom Layer w1.016: L1.2 62.763,45.872 63.974,44.661 D59.1 ; U1.1 69.978,48.57 D59.1@73.32,45.228
NetD60_1: D60.1 L2.2 U2.1 | length 30.3
  Bottom Layer w1.016: L2.2 59.428,69.274 67.276,61.425 D60.1 75.665,61.477 73.193,61.477 71.883,62.787 U2.1
NetD61_1: D61.1 L3.2 U3.1 | length 42.2
  Top Layer w1.016: v1(73.025,97.765) v1(76.454,97.765) 76.513,97.705 76.513,88.764 75.037,87.288 v1(74.955,87.288)
  Bottom Layer w1.016: L3.2 56.799,96.448 58.115,97.765 v1(73.025,97.765) ; U3.1 69.216,88.206 69.434,87.988 69.601,87.988 D61.1 v1@74.996,87.247
NetQ1_2: Q1.2 Q2.3 R1.1 R2.2 | length 15.5
  Bottom Layer w0.508: Q1.2 82.26,64.652 Q2.3 87.849,63.702 88.917,64.77 R2.2 88.917,66.756 90.457,68.296 R1.1
NetQ2_2: Q2.2 Q3.3 R2.1 R3.2 | length 15.5
  Bottom Layer w0.508: Q2.2 82.26,59.08 82.62,58.721 82.698,58.721 83.21,58.209 83.21,58.118 83.281,58.047 87.655,58.047 88.917,59.309 R3.2 88.917,61.295 90.457,62.835 R2.1
NetQ3_2: Q3.2 Q4.3 R3.1 R4.2 | length 18.1
  Bottom Layer w0.508: Q3.2 82.26,53.416 83.21,52.466 Q4.3 ; Q4.3 83.281,52.144 87.213,52.144 88.917,53.848 R4.2 88.917,54.246 89.814,55.143 91.084,55.143 92.354,56.413 92.354,57.412 90.457,59.309 R3.1
NetQ4_2: Q4.2 Q5.3 R4.1 R5.2 | length 17.7
  Bottom Layer w0.508: Q4.2 82.26,47.673 83.21,46.723 Q5.3 87.113,46.473 87.909,47.269 87.909,47.379 88.917,48.387 R5.2 88.913,48.416 88.913,49 90.231,50.317 91.338,50.317 91.846,50.825 91.846,52.484 R4.1
NetQ5_2: Q5.2 Q6.3 R5.1 R6.2 | length 16.8
  Bottom Layer w0.508: Q5.2 82.26,41.929 83.21,40.979 Q6.3 86.544,40.729 88.917,43.102 R6.2 88.917,43.578 91.592,46.253 91.592,47.277 R5.1
NetQ6_2: Q6.2 Q7.3 R6.1 R7.2 | length 16.2
  Bottom Layer w0.508: Q6.2 82.26,36.186 83.21,35.236 Q7.3 86.438,34.986 88.917,37.465 R7.2 88.917,40.657 90.246,41.986 90.246,42.916 R6.1
NetQ7_2: Q7.2 Q8.3 R7.1 R8.2 | length 16.3
  Bottom Layer w0.508: Q7.2 82.26,30.443 83.21,29.493 Q8.3 86.393,29.243 88.917,31.767 R8.2 88.917,34.446 90.457,35.986 R7.1
NetQ8_2: Q8.2 Q9.3 R8.1 R9.2 | length 16.2
  Bottom Layer w0.508: Q8.2 82.26,24.7 83.21,23.75 Q9.3 85.825,23.5 88.741,26.416 R9.2 88.741,28.924 90.457,30.64 R8.1
NetQ9_2: Q9.2 Q10.3 R9.1 R10.2 | length 17
  Bottom Layer w0.508: Q9.2 82.26,18.956 83.21,18.006 Q10.3 87.02,17.756 88.917,19.653 R10.2 88.917,24.147 90.07,25.3 90.07,26.23 R9.1
copper on no net:
  other v4: 5,5 95,5 5,95 95,95

## Polygon pours and split planes (outlines as drawn)
COM3 on Bottom Layer (solid, pour order 44): 48.793,78.257 49.428,74.066 49.174,73.812 42.824,73.812 42.824,77.241 42.951,77.241
COM1_GND on Bottom Layer "Bottom Layer-GND 5" (solid, pour order 16): 44.947,67.567 44.294,69.612 43.266,73.427 39.481,72.553 33.582,67.759 33.582,65.951 37.107,62.426 42.549,66.694
COM5 on Bottom Layer (solid, pour order 48): 45.999,88.29 46.126,88.29 55.016,88.29 55.016,85.8 54.84,85.623 45.999,85.623
COM1 on Bottom Layer (solid, pour order 40): 47.258,67.843 53.365,67.843 53.365,62.128 47.396,62.382 47.2,67.785
no net on Bottom Layer (solid, pour order 38): 47.2,68.097
no net on Bottom Layer "Bottom Layer-No Net" (solid, pour order 28): 40.449,90.537
COM5_GND on Bottom Layer "Bottom Layer-GND 3" (solid, pour order 22): 28,82.167 28,80.832 29.3,79.533 30.717,79.813 31.636,80.731 35.345,84.441 35.345,85.353 34.704,85.994 30.982,84.275 28.114,82.416
COM3_GND on Bottom Layer "Bottom Layer-GND 4" (solid, pour order 18): 56.387,77.706 58.428,77.706 59.58,77.927 60.819,78.455 60.819,83.083 52.363,83.083 50.317,82.679 50.317,78.414 55.902,77.706
COM5_GND on Bottom Layer "Bottom Layer-GND 6" (solid, pour order 14): 27.3,84.923 31.811,89.434 32.256,89.879 33.582,91.205 39.481,91.205 41.417,89.269 41.417,87.606 37.155,86.383 28,82.167
COM5 on Top Layer (solid, pour order 50): 45.999,88.139 46.024,88.139 55.016,88.29 55.016,85.623 45.999,85.623
COM3 on Top Layer (solid, pour order 46): 42.95,77.241 48.793,78.257 49.428,73.856 48.877,73.856 42.887,73.856 42.887,77.178
COM1 on Top Layer (solid, pour order 42): 47.269,67.843 53.365,67.843 53.365,62.128 47.269,62.128
COM3_GND on Top Layer "Top Layer-GND 1" (solid, pour order 26): 52.779,78.272 52.471,78.579 52.311,78.823 52.311,83.219 60.781,83.219 60.845,83.167 60.845,78.272 57.551,78.272 57.008,78.068 56.7,77.76
COM5_GND on Top Layer "Top Layer-GND 2" (solid, pour order 24): 37.811,86.625 37.811,87.425 37.097,88.139 30.849,88.139 27.555,84.845 27.555,81.584 29.3,79.839 29.75,79.839 30.547,79.839 35.299,84.591 35.035,85.124 34.901,85.53
COM1_GND on Top Layer "Top Layer-GND 3" (solid, pour order 20): 44.821,67.531 44.466,69.242 43.333,73.194 40.05,73.194 35.435,68.986 36.652,67.769 40.15,65.621 40.648,66.119 42.887,66.966 44.907,67.556

## Silkscreen, mask and mechanical layers (free items; w line width, h text height)
Top Overlay:
  text "L1" at 92.1,58.857 h1.52
  text "L2" at 91.973,56.286 h1.52
  text "L3" at 91.973,53.619 h1.52
  text "L4" at 92.1,51.079 h1.52
  text "L5" at 92.1,48.539 h1.52
  text "L6" at 92.1,45.847 h1.52
  text "L7" at 92.1,43.332 h1.52
  text "L8" at 92.1,40.919 h1.52
  text "L9" at 92.1,38.252 h1.52
  text "L10" at 90.703,35.839 h1.52
  text "GND" at 90.576,33.172 h1.52
Mechanical 1:
  lines w0.2: -0.017,5 -0.017,94.989 ; 5,100.007 94.988,100.007 ; 5.009,-0.009 95,-0.009 ; 99.995,5.014 99.995,95 ; 39.014,42.977 39.014,43.028 39.014,56.972 60.985,56.972 60.985,43.028 60.935,42.977 39.014,42.977
  lines w0.254: -0.017,5 ccw(c5,5) 5,-0.017 ; -0.007,95 cw(c5,95) 5,100.007 ; 95,-0.009 ccw(c95,5) 100.009,5 ; 95,99.995 cw(c95,95) 99.995,95

## Text inside footprints (layer, text, board x,y; h text height)
P3: Top Overlay "22" at 98.069,32.537 h1.27 r270; Top Overlay "21" at 95.529,32.537 h1.27 r270; Top Overlay "2" at 98.069,62.001 h1.27 r270; Top Overlay "1" at 95.529,62.001 h1.27 r270